# EAGLE board Slim-CC1101-NRF24L01-Adapter (EAGLE 9.6.2)
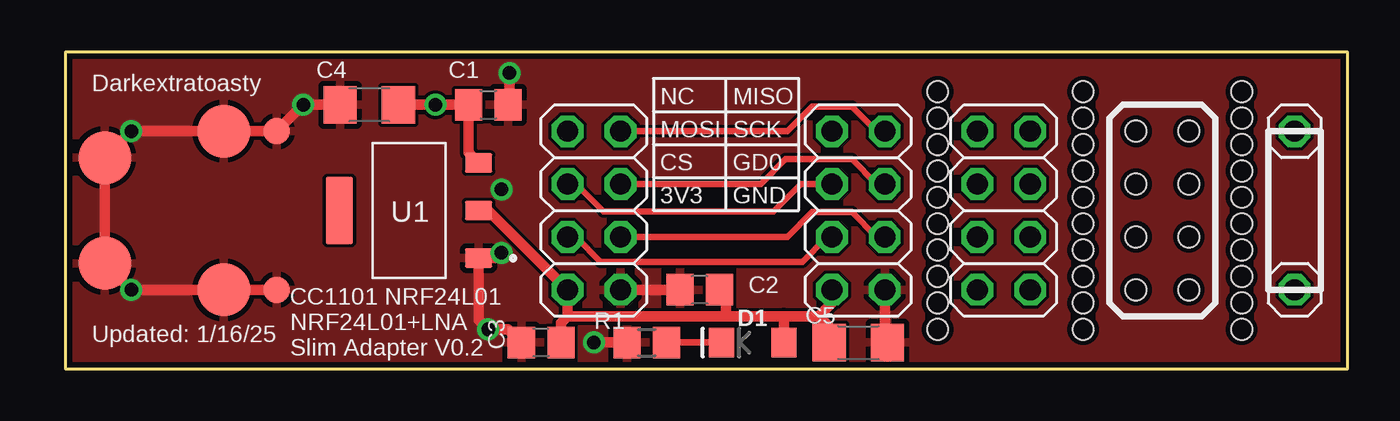
[diagram p0: board, top side]
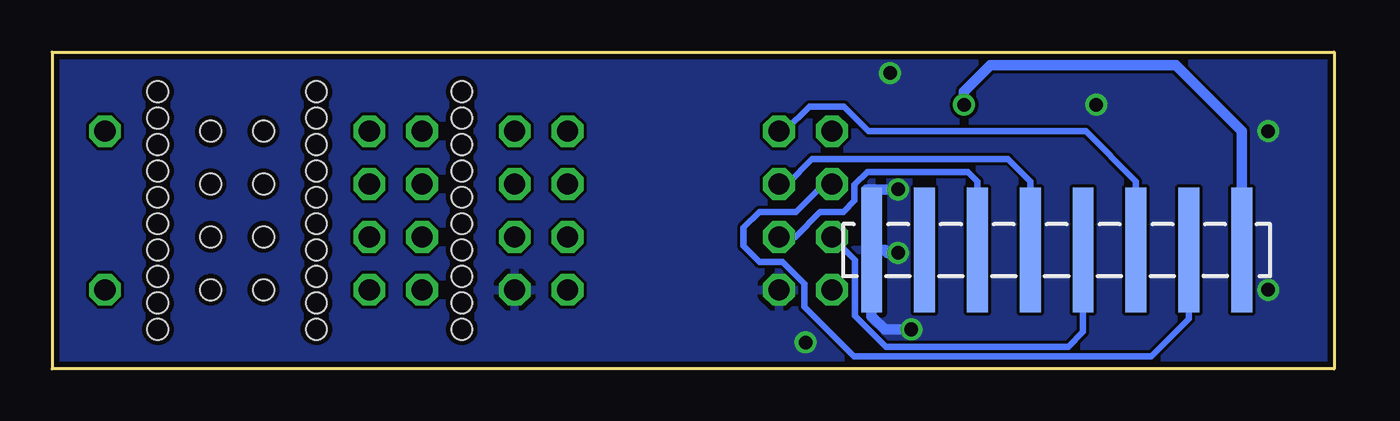
[diagram p1: board, bottom side, seen from below]

Size 61.59 x 15.24 mm. Coordinates in mm from the lower left corner, seen from the top.
Outline: 61.59,15.24 0,15.24 0,0 61.59,0 61.59,15.24
Copper layers (1*16): Top 0.035mm / dielectric 1.5mm / Bottom 0.035mm
Design rules "default *": minimum track width 6mil, minimum drill 0.35mm, track to track 6mil, track to pad 6mil, pad to pad 6mil, via to via 6mil, smd to smd 6mil, copper to edge 10mil, drill to drill 6mil, minimum pad ring 10mil, minimum via ring 8mil, stop-mask expansion 4mil, vias tented up to drill 0mil, thermal gap 10mil
Holes 1 mm at 41.91,8.26 41.91,6.99 41.91,5.71 51.44,3.81 53.98,3.81 53.98,6.35 51.44,6.35 51.44,8.89 53.98,8.89 53.98,11.43 51.44,11.43 41.91,9.53 41.91,3.17 41.91,1.91 41.91,4.45 41.91,13.34 41.91,12.06 41.91,10.79 48.9,8.26 48.9,6.99 48.9,5.71 48.9,9.53 48.9,3.17 48.9,1.91 48.9,4.45 48.9,13.34 48.9,12.06 48.9,10.79 56.52,8.26 56.52,6.99 56.52,5.71 56.52,9.53 56.52,3.17 56.52,1.91 56.52,4.45 56.52,13.34 56.52,12.06 56.52,10.79

## Footprints (pad centres in the part's own frame; a part is rotated, then mirrored left to right if it is on the bottom)
C0805 = smd 1.3 x 1.5: 1 -0.95,0; 2 0.95,0
C3216 = smd 1.6 x 1.8: 1 -1.4,0; 2 1.4,0
LED-1206 = smd 1.2 x 1.4: A -1.5,0; C 1.5,0
2X04 = drill 1.016 octagon: 1 -3.81,-1.27; 2 -3.81,1.27; 3 -1.27,-1.27; 4 -1.27,1.27; 5 1.27,-1.27; 6 1.27,1.27; 7 3.81,-1.27; 8 3.81,1.27
1X01 = drill 1.016 octagon: 1 0,0
R0805 = smd 1.3 x 1.5: 1 -0.95,0; 2 0.95,0
B1,27 = smd 1.27 x 1.27: TP 0,0
B2,54 = smd 2.54 x 2.54: TP 0,0
SOT229P700X180-4N = smd 1.31 x 0.93: 1 -3.345,2.29; 2 -3.345,0; 3 -3.345,-2.29 | smd 1.31 x 3.24: 4 3.345,0
LEFT-H1-SMD = smd 1 x 6 bottom: 1 0,-0.001; 2 2.54,-0.001; 3 5.08,-0.001; 4 7.62,0.001; 5 10.16,-0.001; 6 12.7,0.001; 7 15.24,-0.001; 8 17.78,0.001

## Placement (x,y rotation side)
C1  100nf  [C0805]  20.32,12.7 0 top
C2  100nf  [C0805]  30.48,3.81 180 top
C3  1uf  [C0805]  22.86,1.27 180 top
C4  22uf  [C3216]  14.61,12.7 180 top
C5  22uf  [C3216]  38.1,1.27 0 top
D1  Red  [LED-1206]  33.02,1.27 180 top
JP1  [2X04]  38.1,7.62 90 top
JP2  [2X04]  25.4,7.62 90 top
JP4  [2X04]  45.09,7.62 90 top
JP6  [1X01]  59.05,11.43 0 top
JP7  [1X01]  59.05,3.81 0 top
R1  2K2  [R0805]  27.94,1.27 0 top
TP1  PTR1B1,27  [B1,27]  10.16,11.43 90 top
TP2  PTR1B1,27  [B1,27]  10.16,3.81 90 top
TP3  PTR1B2,54  [B2,54]  7.62,11.43 0 top
TP4  PTR1B2,54  [B2,54]  7.62,3.81 0 top
TP5  PTR1B2,54  [B2,54]  1.91,5.08 0 top
TP6  PTR1B2,54  [B2,54]  1.91,10.16 0 top
U1  AMS1117-3.3  [SOT229P700X180-4N]  16.51,7.62 180 top
U$1  LEFT-H1-SMD  [LEFT-H1-SMD]  4.45,5.71 0 top

## Library data of the parts
C1-C5 = rcl; SPICEPREFIX: C
D1 = SparkFun-LED; PROD_ID: DIO-09912
JP1 JP2 JP4 JP6 JP7 = pinhead
R1 = rcl; SPICEPREFIX: R
TP1-TP6 = testpad
U1 = AMS1117-3.3; AVAILABILITY: Not in stock; CHECK_PRICES: https://www.snapeda.com/parts/AMS1117-3.3/Advanced+Monolithic+Systems/view-part/?ref=eda; DESCRIPTION: Sot223/Pkg 1-Amp 3.3-Volt Low Drop Out Voltage Regulatator; MF: Advanced Monolithic Systems; MP: AMS1117-3.3; PACKAGE: SOT-223 Seeed Technology; PRICE: None; SNAPEDA_LINK: https://www.snapeda.com/parts/AMS1117-3.3/Advanced+Monolithic+Systems/view-part/?ref=snap
U$1 = Flipper-Zero-GPIO-Headers

## Nets
+3V3: C2.1 C3.1 C5.1 D1.A JP1.2 JP2.2 U1.2
+5V: C1.1 C4.1 U1.3 U$1.1
CS: JP1.4 JP2.4 U$1.4
GD0: JP1.3 JP2.3 U$1.6
GND: C1.2 C2.2 C3.2 C4.2 C5.2 JP1.1 JP2.1 R1.1 TP1.TP TP2.TP TP3.TP TP4.TP TP5.TP TP6.TP U1.1 U$1.8
MISO: JP1.7 JP2.7 U$1.3
MOSI: JP1.6 JP2.6 U$1.2
N$1: D1.C R1.2
SCK: JP1.5 JP2.5 U$1.5

## Tracks (layer width: path | path; a pad name or v marks a point on that pad's centre or on a via)
+3V3
  Top 0.508: C3.1 23.81,2.22 24.13,2.54 | 24.13,2.54 JP2.2 20.32,7.62 U1.2 | 24.13,2.54 31.75,2.54 | 31.75,2.54 34.52,2.54 | 34.52,2.54 D1.A | 34.52,2.54 36.2,2.54 | 36.2,2.54 36.83,3.17 JP1.2 | 36.2,2.54 36.7,2.04 C5.1 | 31.75,2.54 31.75,3.49 C2.1
+5V  (via drill 0.65)
  Top 0.508: C4.1 v17.78,12.7 C1.1 19.37,10.39 U1.3
  Bottom 0.508: U$1.1 4.45,11.43 7.62,14.61 16.51,14.61 17.78,13.34 v17.78,12.7
CS
  Top 0.305: JP1.4 36.6,6.35 35.41,5.16 25.72,5.16 24.53,6.35 JP2.4
  Bottom 0.305: U$1.4 12.06,1.78 12.78,1.07 21.55,1.07 23.03,2.56 23.03,5.25 JP2.4
GD0
  Top 0.305: JP2.3 34.69,6.35 35.88,7.54 37.78,7.54 38.97,6.35 JP1.3
  Bottom 0.305: JP2.3 25.89,6.35 24.7,7.54 23.59,7.54 23.04,8.09 23.04,8.87 22.44,9.47 17.6,9.47 17.14,9.01 U$1.6
GND  (via drill 0.65)
  Top 0.508: C2.2 JP2.1 | R1.1 v25.4,1.27 | C5.2 39.37,1.4 JP1.1 | C3.2 21.27,1.91 v20.32,1.91 19.86,2.37 U1.1 20.7,5.33 v20.95,5.59 | C4.2 v11.43,12.7 TP1.TP TP3.TP v3.17,11.43 TP6.TP TP5.TP v3.17,3.81 TP4.TP TP2.TP | C1.2 21.34,12.77 v21.34,14.22
  Bottom 0.508: U$1.8 22.48,5.97 22.48,8.64 v20.95,8.64 | U$1.8 21.59,5.72 21.46,5.59 v20.95,5.59 | U$1.8 22.23,2.54 21.59,1.91 v20.32,1.91
  pour Top: 0,15.24 61.59,15.24 61.59,0 0,0
  pour Bottom: 0,15.24 61.59,15.24 61.59,0 0,0
MISO
  Top 0.305: JP2.7 34.69,11.43 35.88,12.62 37.78,12.62 38.97,11.43 JP1.7
  Bottom 0.305: U$1.3 9.53,9.01 11.94,11.43 22.37,11.43 23.56,12.62 25.21,12.62 26.4,11.43 JP2.7
MOSI
  Top 0.305: JP1.6 35.33,8.89 34.01,7.57 25.85,7.57 24.53,8.89 JP2.6
  Bottom 0.305: U$1.2 6.99,2.42 8.79,0.61 23.08,0.61 25.45,2.99 25.45,4.1 26.51,5.16 27.62,5.16 28.37,5.91 28.37,6.79 27.62,7.54 25.86,7.54 24.51,8.89 JP2.6
N$1
  Top 0.305: D1.C R1.2
SCK
  Top 0.305: JP2.5 33.42,8.89 34.61,10.08 37.78,10.08 38.97,8.89 JP1.5
  Bottom 0.305: U$1.5 14.61,9.01 15.68,10.08 25.08,10.08 26.27,8.89 JP2.5

## Text on the board
tPlace: Darkextratoasty | NC | MISO | MOSI | SCK | CS | GD0 | 3V3 | GND | Updated: 1/16/25 | CC1101 NRF24L01 / NRF24L01+LNA / Slim Adapter V0.2